# Altium PCB MainBoardSTM32.PcbDoc
Units mil, origin at the board's own origin, x right, y up, seen from the top; angles counter-clockwise.
Board outline 4905 x 5465 mil, 2 copper layers (Top Layer, Bottom Layer); 34 components, 43 nets, 169 pads, 216 vias.
Unrouted connection lines stored in the file: 7.
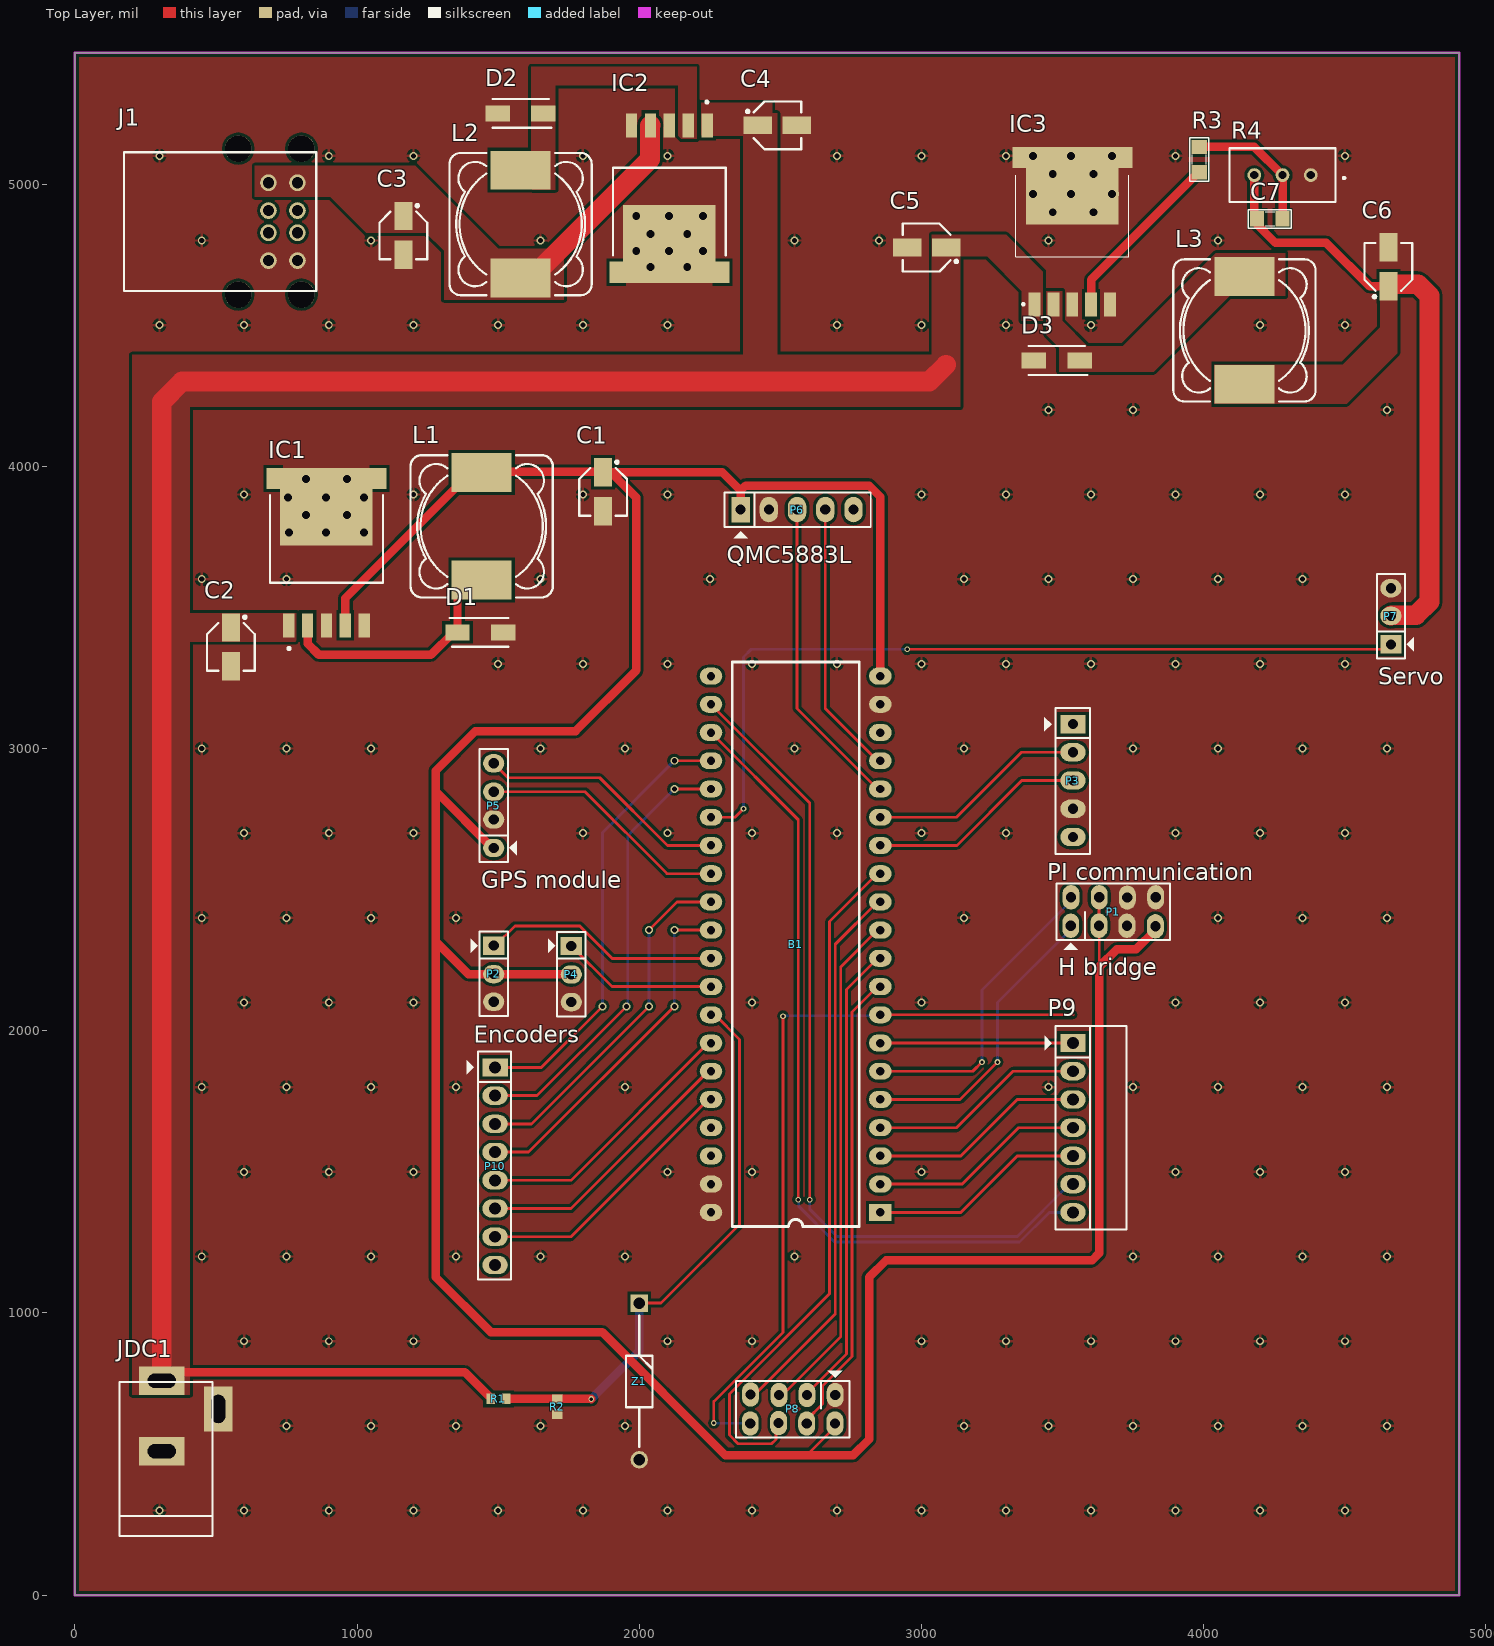
[diagram p0: Top Layer view]
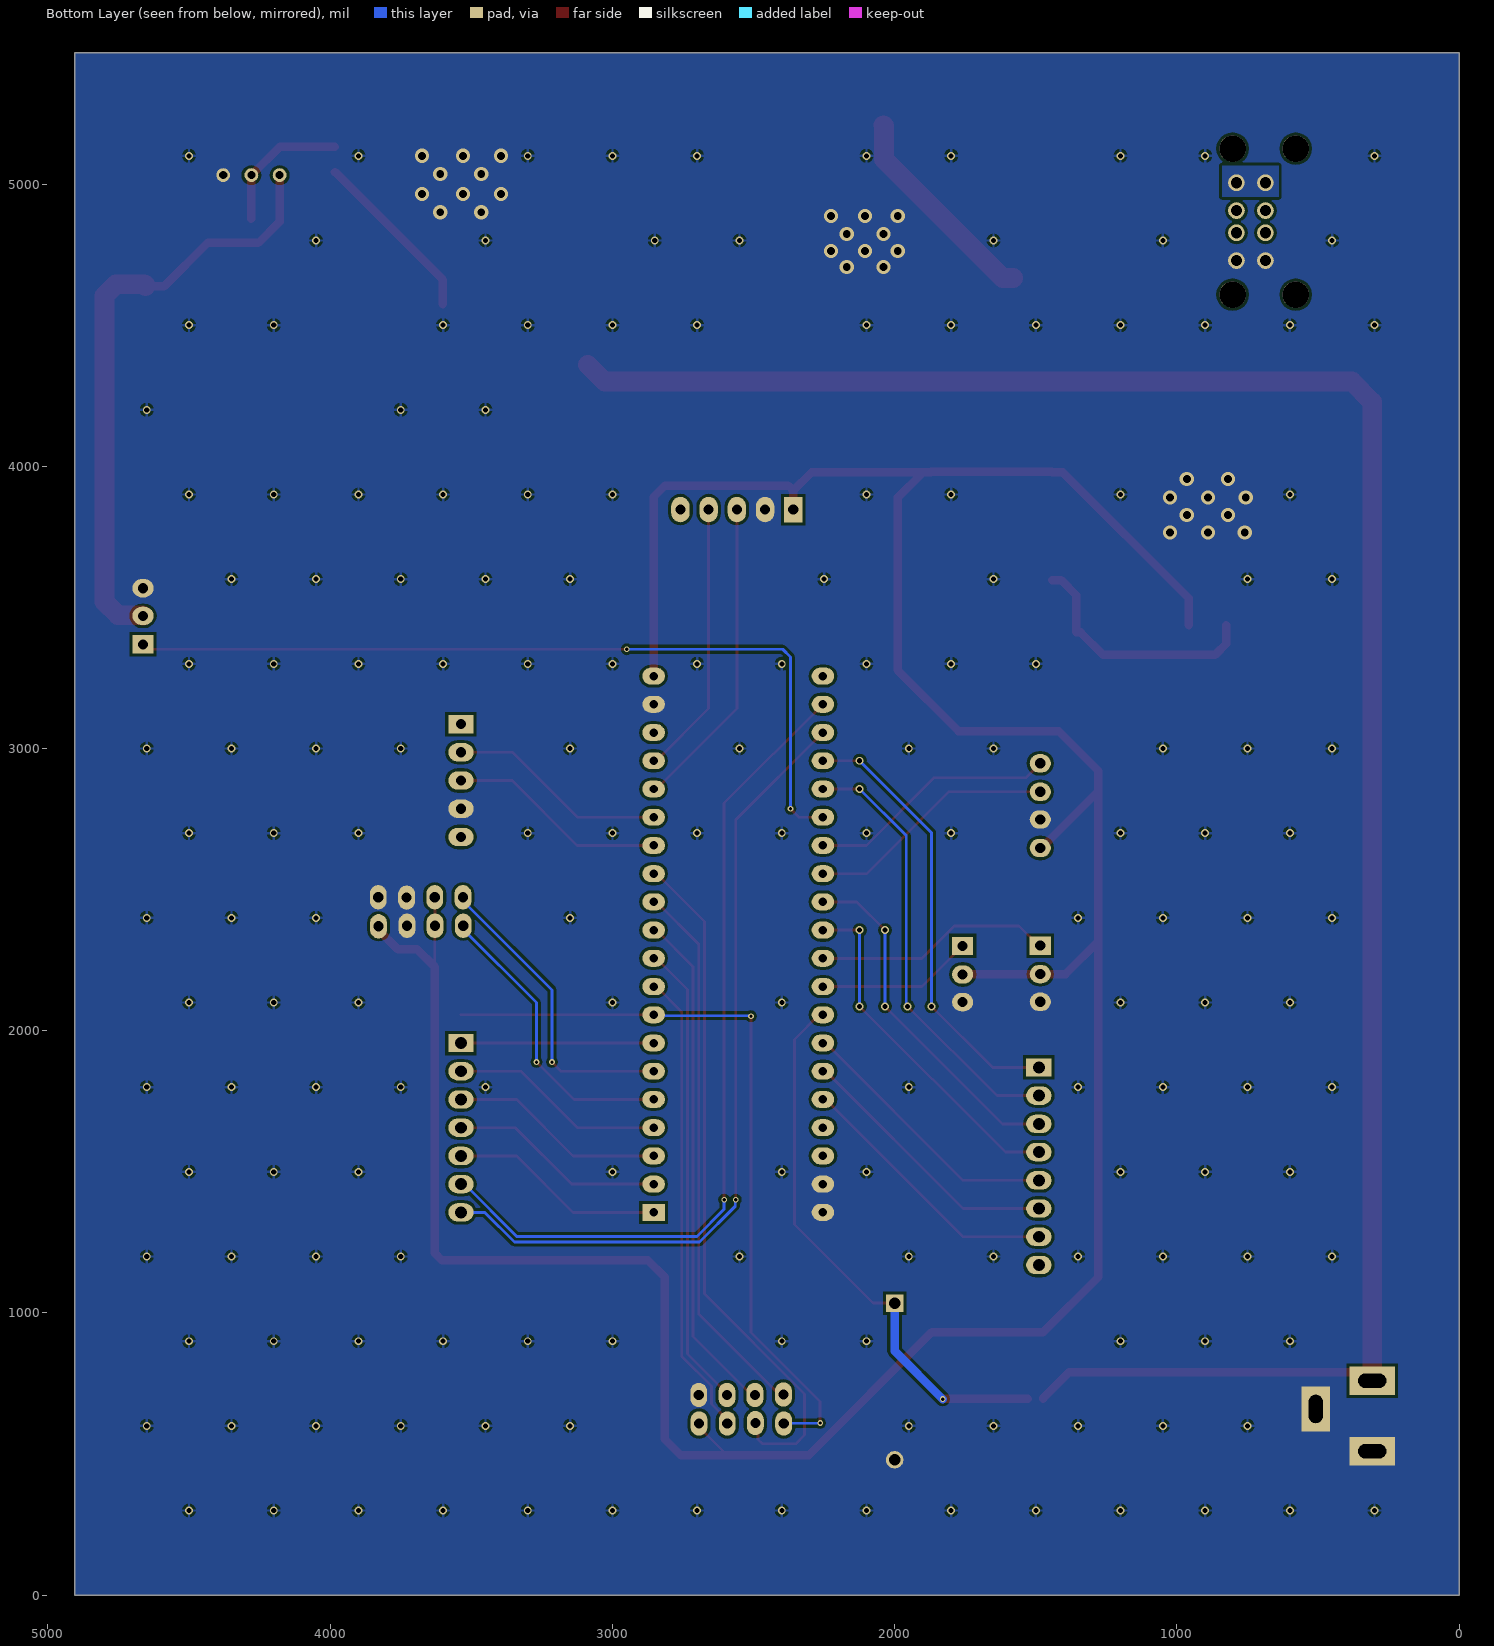
[diagram p1: Bottom Layer view, seen from below]
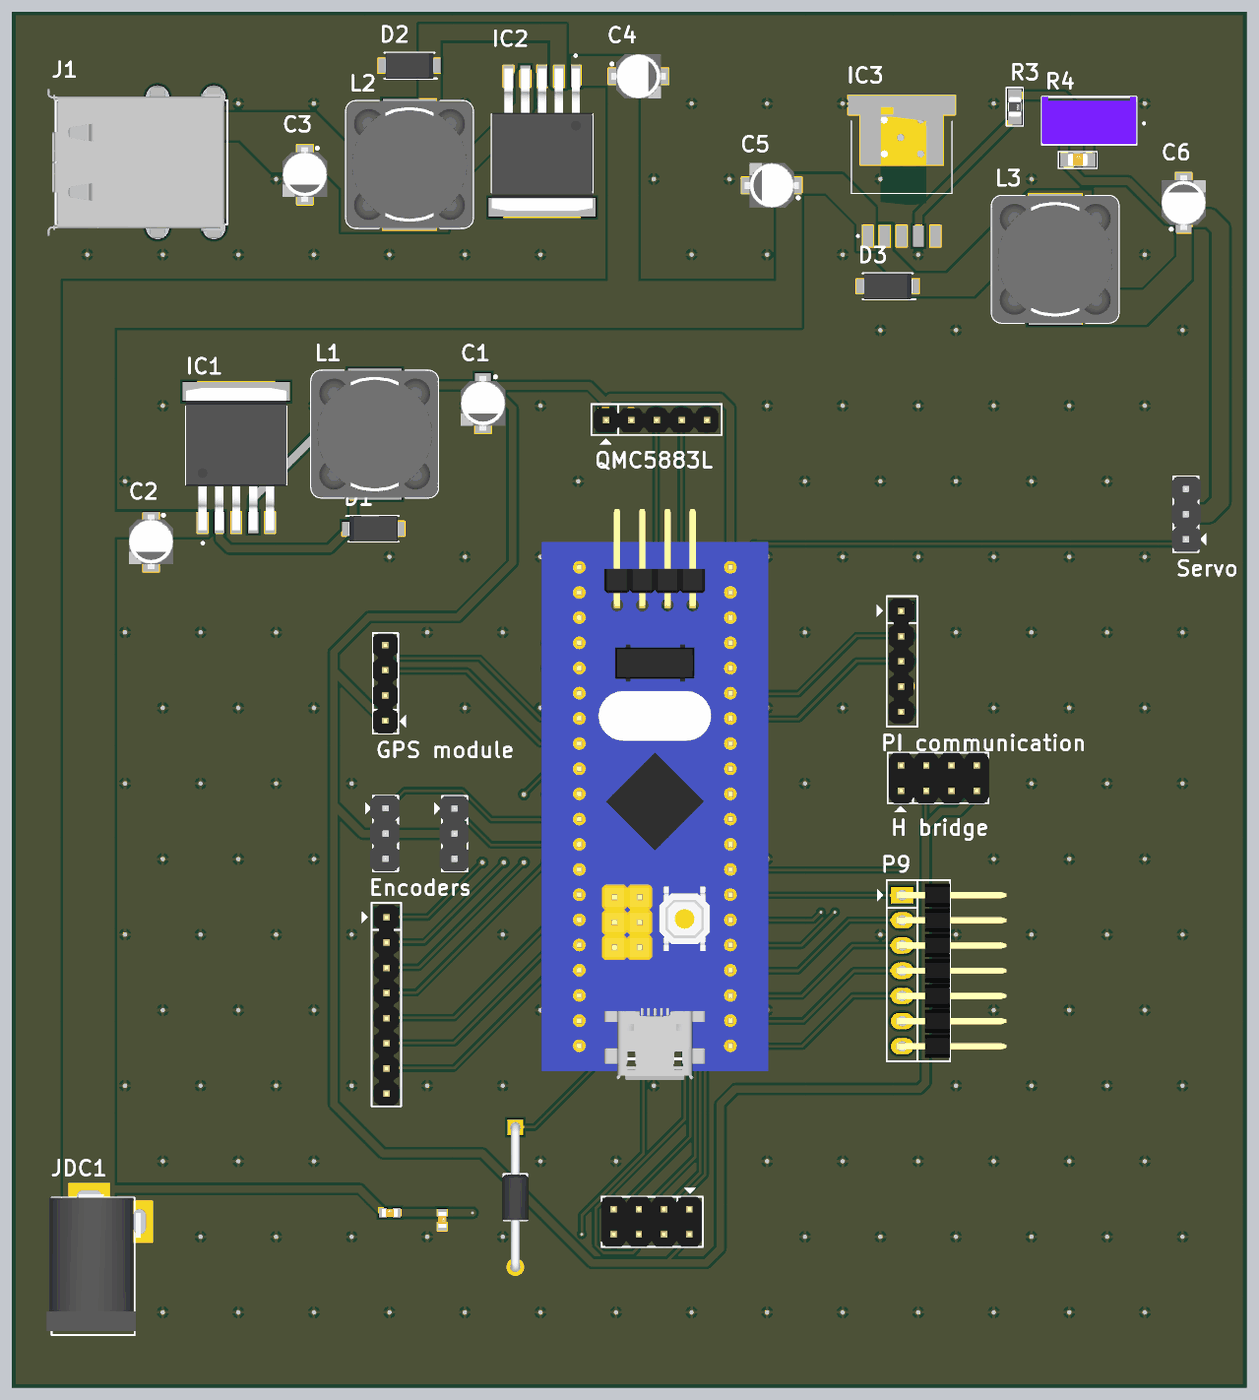
[diagram p2: 3D render of the assembled board from above, using the file's embedded part models]

## Layer stack, top to bottom
Top Solder: solder mask 0.4, Solder Resist, Dk 3.5
Top Layer: signal copper 1.4
Dielectric 1: dielectric 12.6, FR-4, Dk 4.8
Bottom Layer: signal copper 1.4
Bottom Solder: solder mask 0.4, Solder Resist, Dk 3.5

## Board outline
0,0 0,5465 4905,5465 4905,0

## Design rules (kind name [scope] priority, off if disabled: settings)
Clearance [All] p1: gap=10 ignorepadtopadclearanceinfootprint=FALSE except(0: Arc-Hole Track-Hole SMDPad-Hole THPad-Hole Via-Hole Fill-Hole Poly-Hole Region-Hole Text-Hole)
PolygonConnect PolygonConnect_26 [All vs IsNamedPolygon('Top Layer-No Net')] p1: thpad.connectstyle=Direct thpad.reliefconductorwidth=10 thpad.reliefentries=4 thpad.polygonreliefangle="90 Angle" thpad.airgapwidth=10 smdpad.connectstyle=Direct smdpad.reliefconductorwidth=10 smdpad.reliefentries=4 smdpad.polygonreliefangle="90 Angle" smdpad.airgapwidth=10 via.connectstyle=Relief via.reliefconductorwidth=10 via.reliefentries=4 via.polygonreliefangle="90 Angle" via.airgapwidth=10
PolygonConnect PolygonConnect_25 [All vs IsNamedPolygon('Bottom Layer-GND')] p2: thpad.connectstyle=Direct thpad.reliefconductorwidth=10 thpad.reliefentries=4 thpad.polygonreliefangle="90 Angle" thpad.airgapwidth=10 smdpad.connectstyle=Direct smdpad.reliefconductorwidth=10 smdpad.reliefentries=4 smdpad.polygonreliefangle="90 Angle" smdpad.airgapwidth=10 via.connectstyle=Relief via.reliefconductorwidth=10 via.reliefentries=4 via.polygonreliefangle="90 Angle" via.airgapwidth=10
PolygonConnect PolygonConnect_24 [All vs IsNamedPolygon('Top Layer-GND')] p3: thpad.connectstyle=Direct thpad.reliefconductorwidth=10 thpad.reliefentries=4 thpad.polygonreliefangle="90 Angle" thpad.airgapwidth=10 smdpad.connectstyle=Direct smdpad.reliefconductorwidth=10 smdpad.reliefentries=4 smdpad.polygonreliefangle="90 Angle" smdpad.airgapwidth=10 via.connectstyle=Relief via.reliefconductorwidth=10 via.reliefentries=4 via.polygonreliefangle="90 Angle" via.airgapwidth=10
PolygonConnect PolygonConnect_23 [All vs IsNamedPolygon('Bottom Layer-5V')] p4: thpad.connectstyle=Direct thpad.reliefconductorwidth=10 thpad.reliefentries=4 thpad.polygonreliefangle="90 Angle" thpad.airgapwidth=10 smdpad.connectstyle=Direct smdpad.reliefconductorwidth=10 smdpad.reliefentries=4 smdpad.polygonreliefangle="90 Angle" smdpad.airgapwidth=10 via.connectstyle=Relief via.reliefconductorwidth=10 via.reliefentries=4 via.polygonreliefangle="90 Angle" via.airgapwidth=10
PolygonConnect PolygonConnect_22 [All vs IsNamedPolygon('Top Layer-GND')] p5: thpad.connectstyle=Direct thpad.reliefconductorwidth=10 thpad.reliefentries=4 thpad.polygonreliefangle="90 Angle" thpad.airgapwidth=10 smdpad.connectstyle=Direct smdpad.reliefconductorwidth=10 smdpad.reliefentries=4 smdpad.polygonreliefangle="90 Angle" smdpad.airgapwidth=10 via.connectstyle=Relief via.reliefconductorwidth=10 via.reliefentries=4 via.polygonreliefangle="90 Angle" via.airgapwidth=10
PolygonConnect PolygonConnect_21 [All vs IsNamedPolygon('Top Layer-No Net 7')] p6: thpad.connectstyle=Direct thpad.reliefconductorwidth=10 thpad.reliefentries=4 thpad.polygonreliefangle="90 Angle" thpad.airgapwidth=10 smdpad.connectstyle=Direct smdpad.reliefconductorwidth=10 smdpad.reliefentries=4 smdpad.polygonreliefangle="90 Angle" smdpad.airgapwidth=10 via.connectstyle=Relief via.reliefconductorwidth=10 via.reliefentries=4 via.polygonreliefangle="90 Angle" via.airgapwidth=10
PolygonConnect PolygonConnect_20 [All vs IsNamedPolygon('Top Layer-No Net 8')] p7: thpad.connectstyle=Direct thpad.reliefconductorwidth=10 thpad.reliefentries=4 thpad.polygonreliefangle="90 Angle" thpad.airgapwidth=10 smdpad.connectstyle=Direct smdpad.reliefconductorwidth=10 smdpad.reliefentries=4 smdpad.polygonreliefangle="90 Angle" smdpad.airgapwidth=10 via.connectstyle=Relief via.reliefconductorwidth=10 via.reliefentries=4 via.polygonreliefangle="90 Angle" via.airgapwidth=10
PolygonConnect PolygonConnect_19 [All vs IsNamedPolygon('Top Layer-No Net 8')] p8: thpad.connectstyle=Direct thpad.reliefconductorwidth=10 thpad.reliefentries=4 thpad.polygonreliefangle="90 Angle" thpad.airgapwidth=10 smdpad.connectstyle=Direct smdpad.reliefconductorwidth=10 smdpad.reliefentries=4 smdpad.polygonreliefangle="90 Angle" smdpad.airgapwidth=10 via.connectstyle=Relief via.reliefconductorwidth=10 via.reliefentries=4 via.polygonreliefangle="90 Angle" via.airgapwidth=10
PolygonConnect PolygonConnect_18 [All vs IsNamedPolygon('Top Layer-No Net 9')] p9: thpad.connectstyle=Direct thpad.reliefconductorwidth=10 thpad.reliefentries=4 thpad.polygonreliefangle="90 Angle" thpad.airgapwidth=10 smdpad.connectstyle=Direct smdpad.reliefconductorwidth=10 smdpad.reliefentries=4 smdpad.polygonreliefangle="90 Angle" smdpad.airgapwidth=10 via.connectstyle=Relief via.reliefconductorwidth=10 via.reliefentries=4 via.polygonreliefangle="90 Angle" via.airgapwidth=10
PolygonConnect PolygonConnect_17 [All vs IsNamedPolygon('Top Layer- 12V Main')] p10: thpad.connectstyle=Direct thpad.reliefconductorwidth=10 thpad.reliefentries=4 thpad.polygonreliefangle="90 Angle" thpad.airgapwidth=10 smdpad.connectstyle=Direct smdpad.reliefconductorwidth=10 smdpad.reliefentries=4 smdpad.polygonreliefangle="90 Angle" smdpad.airgapwidth=10 via.connectstyle=Relief via.reliefconductorwidth=10 via.reliefentries=4 via.polygonreliefangle="90 Angle" via.airgapwidth=10
PolygonConnect PolygonConnect_16 [All vs IsNamedPolygon('Top Layer-No Net 1')] p11: thpad.connectstyle=Direct thpad.reliefconductorwidth=10 thpad.reliefentries=4 thpad.polygonreliefangle="90 Angle" thpad.airgapwidth=10 smdpad.connectstyle=Direct smdpad.reliefconductorwidth=10 smdpad.reliefentries=4 smdpad.polygonreliefangle="90 Angle" smdpad.airgapwidth=10 via.connectstyle=Relief via.reliefconductorwidth=10 via.reliefentries=4 via.polygonreliefangle="90 Angle" via.airgapwidth=10
PolygonConnect PolygonConnect_15 [All vs IsNamedPolygon('Top Layer-No Net 2')] p12: thpad.connectstyle=Direct thpad.reliefconductorwidth=10 thpad.reliefentries=4 thpad.polygonreliefangle="90 Angle" thpad.airgapwidth=10 smdpad.connectstyle=Direct smdpad.reliefconductorwidth=10 smdpad.reliefentries=4 smdpad.polygonreliefangle="90 Angle" smdpad.airgapwidth=10 via.connectstyle=Relief via.reliefconductorwidth=10 via.reliefentries=4 via.polygonreliefangle="90 Angle" via.airgapwidth=10
PolygonConnect PolygonConnect_14 [All vs IsNamedPolygon('Top Layer- 12-5')] p13: thpad.connectstyle=Direct thpad.reliefconductorwidth=10 thpad.reliefentries=4 thpad.polygonreliefangle="90 Angle" thpad.airgapwidth=10 smdpad.connectstyle=Direct smdpad.reliefconductorwidth=10 smdpad.reliefentries=4 smdpad.polygonreliefangle="90 Angle" smdpad.airgapwidth=10 via.connectstyle=Relief via.reliefconductorwidth=10 via.reliefentries=4 via.polygonreliefangle="90 Angle" via.airgapwidth=10
PolygonConnect PolygonConnect_13 [All vs IsNamedPolygon('Top Layer-12-6')] p14: thpad.connectstyle=Direct thpad.reliefconductorwidth=10 thpad.reliefentries=4 thpad.polygonreliefangle="90 Angle" thpad.airgapwidth=10 smdpad.connectstyle=Direct smdpad.reliefconductorwidth=10 smdpad.reliefentries=4 smdpad.polygonreliefangle="90 Angle" smdpad.airgapwidth=10 via.connectstyle=Relief via.reliefconductorwidth=10 via.reliefentries=4 via.polygonreliefangle="90 Angle" via.airgapwidth=10
PolygonConnect PolygonConnect_12 [All vs IsNamedPolygon('Top Layer-No Net 4')] p15: thpad.connectstyle=Direct thpad.reliefconductorwidth=10 thpad.reliefentries=4 thpad.polygonreliefangle="90 Angle" thpad.airgapwidth=10 smdpad.connectstyle=Direct smdpad.reliefconductorwidth=10 smdpad.reliefentries=4 smdpad.polygonreliefangle="90 Angle" smdpad.airgapwidth=10 via.connectstyle=Relief via.reliefconductorwidth=10 via.reliefentries=4 via.polygonreliefangle="90 Angle" via.airgapwidth=10
PolygonConnect PolygonConnect_11 [All vs IsNamedPolygon('Top Layer-No Net 3')] p16: connectstyle=Direct reliefconductorwidth=10 reliefentries=4 polygonreliefangle="90 Angle" airgapwidth=10
PolygonConnect PolygonConnect_10 [All vs IsNamedPolygon('Top Layer-No Net 3')] p17: connectstyle=Direct reliefconductorwidth=10 reliefentries=4 polygonreliefangle="90 Angle" airgapwidth=10
PolygonConnect PolygonConnect_9 [All vs IsNamedPolygon('Top Layer-No Net 4')] p18: connectstyle=Direct reliefconductorwidth=10 reliefentries=4 polygonreliefangle="90 Angle" airgapwidth=10
PolygonConnect PolygonConnect_8 [All vs IsNamedPolygon('Top Layer-12-6')] p19: connectstyle=Direct reliefconductorwidth=10 reliefentries=4 polygonreliefangle="90 Angle" airgapwidth=10
PolygonConnect PolygonConnect_7 [All vs IsNamedPolygon('Top Layer- 12-5')] p20: connectstyle=Direct reliefconductorwidth=10 reliefentries=4 polygonreliefangle="90 Angle" airgapwidth=10
PolygonConnect PolygonConnect_6 [InNet('OUTPUT5V') vs IsNamedPolygon('Top Layer-No Net 2')] p21: connectstyle=Direct reliefconductorwidth=10 reliefentries=4 polygonreliefangle="90 Angle" airgapwidth=10
PolygonConnect PolygonConnect_5 [All vs IsNamedPolygon('Top Layer-No Net 2')] p22: connectstyle=Direct reliefconductorwidth=10 reliefentries=4 polygonreliefangle="90 Angle" airgapwidth=10
PolygonConnect PolygonConnect_4 [All vs IsNamedPolygon('Top Layer-No Net 2')] p23: thpad.connectstyle=Direct thpad.reliefconductorwidth=10 thpad.reliefentries=4 thpad.polygonreliefangle="90 Angle" thpad.airgapwidth=10 smdpad.connectstyle=Direct smdpad.reliefconductorwidth=10 smdpad.reliefentries=4 smdpad.polygonreliefangle="90 Angle" smdpad.airgapwidth=10 via.connectstyle=Relief via.reliefconductorwidth=10 via.reliefentries=4 via.polygonreliefangle="90 Angle" via.airgapwidth=10
PolygonConnect PolygonConnect_3 [All vs IsNamedPolygon('Top Layer-No Net 2')] p24: thpad.connectstyle=Direct thpad.reliefconductorwidth=10 thpad.reliefentries=4 thpad.polygonreliefangle="90 Angle" thpad.airgapwidth=10 smdpad.connectstyle=Direct smdpad.reliefconductorwidth=10 smdpad.reliefentries=4 smdpad.polygonreliefangle="90 Angle" smdpad.airgapwidth=10 via.connectstyle=Relief via.reliefconductorwidth=10 via.reliefentries=4 via.polygonreliefangle="90 Angle" via.airgapwidth=10
PolygonConnect PolygonConnect_2 [All vs IsNamedPolygon('Top Layer-No Net 1')] p25: thpad.connectstyle=Direct thpad.reliefconductorwidth=10 thpad.reliefentries=4 thpad.polygonreliefangle="90 Angle" thpad.airgapwidth=10 smdpad.connectstyle=Direct smdpad.reliefconductorwidth=10 smdpad.reliefentries=4 smdpad.polygonreliefangle="90 Angle" smdpad.airgapwidth=10 via.connectstyle=Relief via.reliefconductorwidth=10 via.reliefentries=4 via.polygonreliefangle="90 Angle" via.airgapwidth=10
PolygonConnect PolygonConnect_1 [All vs IsNamedPolygon('Top Layer- 12V Main')] p26: thpad.connectstyle=Direct thpad.reliefconductorwidth=10 thpad.reliefentries=4 thpad.polygonreliefangle="90 Angle" thpad.airgapwidth=10 smdpad.connectstyle=Direct smdpad.reliefconductorwidth=10 smdpad.reliefentries=4 smdpad.polygonreliefangle="90 Angle" smdpad.airgapwidth=10 via.connectstyle=Relief via.reliefconductorwidth=10 via.reliefentries=4 via.polygonreliefangle="90 Angle" via.airgapwidth=10
PolygonConnect [All] p27: connectstyle=Relief reliefconductorwidth=10 reliefentries=4 polygonreliefangle="90 Angle" airgapwidth=10
RoutingVias [All] p1: holewidth=18 width=30 viastyle="Through Hole" minholewidth=12 minwidth=20 maxholewidth=25 maxwidth=28
SolderMaskExpansion [All] p1: expansion=4
Width [All] p1: maxlimit=70 minlimit=10 preferedwidth=30 minimp=50.000000 maximp=50.000000 favimp=50.000000
30 further rules are at their usual default settings.

## Classes and differential pairs
component class MainBoardSTM32: B1 C1 C2 C3 C4 C5 C6 C7 IC1 IC2 IC3 J1 JDC1 L1 L2 L3 P1 P2 P3 P4 P5 P6 P7 P8 P9 R1 R2 R3 R4 Z1

## Components (designator, comment, footprint, x,y, rotation, side; value= is the part's Value field where it differs from the comment)
B1 "Bluepill" Bluepill 2854.2,1356.5 r180 top
C1 "Cap Pol SMD" "CAP ALU SIZE B" 1871.7,3909.45 r270 top value=220uF
C2 "Cap Pol SMD" "CAP ALU SIZE B" 553.2,3360 r270 top value=680uF
C3 "Cap Pol SMD" "CAP ALU SIZE B" 1164.2,4818 r270 top value=220uF
C4 "Cap Pol SMD" "CAP ALU SIZE B" 2489.2,5208 r0 top value=680uF
C5 "Cin" "CAP ALU SIZE B" 3018.2,4775 r180 top value=470uF
C6 "Cout" "CAP ALU SIZE B" 4654.2,4706.5 r90 top value=220uF
C7 "CFF" CAP-SM-0805 4189.2,4876.5 r0 top value=680uF
D1 "SS54" DIOM5026X262N 1436.7,3411.5 r0 top
D2 "SS54" DIOM5026X262N 1579.71,5250.52 r180 top
D3 "SS54" DIOM5026X262N 3479.2,4374.45 r180 top
IC1 "LM2596SX-3.3_NOPB" KTT0005B 891.7,3927.09 r270 top
IC2 "LM2596S-5.0_NOPB" KTT0005B 2106.64,4717.41 r90 top
IC3 "LM2596S-ADJ_NOPB" LM2596SXADJ 3534.2,4831.5 r270 top
J1 "Pi's power" MOLEX-DUALUSB 686.29,4866.66 r270 top
JDC1 "Jack DC" DC-IN 408.2,635 r90 top value="Jac DC"
L1 "Inductor" "INDUCTOR 12.5x12.5" 1441.7,3787.41 r270 top value=33uH
L2 "Inductor" "INDUCTOR 12.5x12.5" 1579.71,4858 r90 top value=33uH
L3 "Inductor" "INDUCTOR 12.5x12.5" 4144.2,4481.5 r90 top value=33uH
P1 "H bridge" JP4x2 3679.2,2421.5 r0 top
P2 "Encoders" JP3 1484.2,2201.5 r270 top
P3 "PI communication" JP5 3536.7,3086.5 r270 top
P4 "Encoder2" JP3 1759.2,2200.5 r270 top
P5 "GPS module" JP4 1484.2,2747.5 r90 top
P6 "QMC5883L" JP5 2359.2,3846.5 r0 top
P7 "Servo" JP3 4663.2,3469 r90 top
P8 "NRF24L01" JP4x2 2543.7,660 r180 top
P9 "Spare 2" JP7H 3536.7,1956.5 r270 top
P10 "Spare 1" JP8 1489.2,1870 r270 top
R1 "RESISTOR SMD" RES-SM-0603 1474.2,695.56 r0 top value=1K
R2 "RESISTOR SMD" RES-SM-0603 1710,695 r270 top value=1K
R3 "RESISTOR SMD" RES-SM-0805 3984.2,5131.7 r270 top value=1K
R4 "3296W-1-101LF" 3296W-1 4279.2,5031.5 r180 top
Z1 "1N4728ATR" DIOAD1413W86L463D238 2000,1035 r270 top

## Footprints (in the part's own frame and the unit in brackets; to place one, negate y for a bottom-side part, rotate by r counter-clockwise, add the part's x,y. Pads: shape width x height; smd on the part's side, far side on the other; paste and mask are expansions set on the pad)
3296W-1 [mm]
  round 1.24 hole 0.74: 1(-2.54,0) 2(0,0) 3(2.54,0)
  silkscreen extent -5.64,-2.41 4.76,2.41, body extent -4.78,-2.48 4.78,2.35, height 11.55
Bluepill [mil]
  rect 80x60 / inner rect 100x50 / far side rect 80x60 hole 30: 1(0,0)
  oval 80x60 / inner oval 100x50 / far side oval 80x60 hole 30: 2(0,-100) 3(0,-200) 4(0,-300) 5(0,-400) 6(0,-500) 7(0,-600) 8(0,-700) 9(0,-800) 10(0,-900) 11(0,-1000) 12(0,-1100) 13(0,-1200) 14(0,-1300) 15(0,-1400) 16(0,-1500) 17(0,-1600) 18(0,-1700) 19(0,-1800) 20(0,-1900) 21(600,-1900) 22(600,-1800) 23(600,-1700) 24(600,-1600) 25(600,-1500) 26(600,-1400) 27(600,-1300) 28(600,-1200) 29(600,-1100) 30(600,-1000) 31(600,-900) 32(600,-800) 33(600,-700) 34(600,-600) 35(600,-500) 36(600,-400) 37(600,-300) 38(600,-200) 39(600,-100) 40(600,0)
  silkscreen extent 75,-1950 525,50, body extent -1100,-2133 1000,500, height 385
"CAP ALU SIZE B" [mm] "Capacitor, Aluminium Electrolytric, 4.3mm L X 4.3mm W X 5.4mm H, IPC Medium Density"
  rect 2.55x1.6 smd: 1(-1.75,0) 2(1.75,0)
  silkscreen extent -2.8,-2.15 2.15,2.15, body extent -2.75,-2.25 2.75,2.25, height 5.7
CAP-SM-0805 [mil]
  rect 50x55 smd: 1(0,0) 2(90,0)
  silkscreen extent -32,-34 121,33, body extent 6,-25 84,25, height 31
DC-IN [mil] "Jac DC input"
  rect 100x160 hole 50 slot 100 at 90 deg: 1(125,100) 2(-125,100)
  rect 160x100 hole 50 slot 100 at 0 deg: 3(25,-100)
  silkscreen extent -425,-80 120,250, body extent -410,-105 134,269, height 434
DIOAD1413W86L463D238 [mm]
  rect 1.575x1.575 hole 1.05: 1(0,0)
  round 1.575 hole 1.05: 2(14.1,0)
  silkscreen extent 1.14,-1.19 12.96,1.19, body extent -0.43,-1.36 14.56,1.36, height 2.71
DIOM5026X262N [mm]
  rect 2.2x1.45 smd: 1(-2.05,0) 2(2.05,0)
  silkscreen extent -2.78,-1.3 2.52,1.3, body extent -2.52,-1.3 2.52,1.3, height 2.62
"INDUCTOR 12.5x12.5" [mm] "SMD Inductor  Body Width 12.5mm Body Lenght 12.5mm Height 8mm"
  rect 3.5x5.4 smd: 1(-4.85,0) 2(4.85,0)
  silkscreen extent -6.4,-6.4 6.4,6.4, body extent -6.4,-6.4 6.4,6.4, height 8
JP3 [mil] "Jumper 3"
  rect 65x75 hole 36: 1(-100,0)
  oval 65x75 hole 36: 2(1,0) 3(99,0)
  silkscreen extent -150,-81 150,50, body extent -150,-60 150,55, height 355
JP4 [mil] "Jumper 4"
  oval 65x75 hole 36: 1(-100,0) 2(1,0) 3(99,0) 4(200,0)
  silkscreen extent -150,-81 250,50, body extent -148,-48 248,50, height 323
JP4x2 [mil] "Connector 4x2"
  oval 60x86 hole 36: 1(-150.5,-49.5) 2(-50.5,-49.5) 3(48.5,-49.5) 4(149.5,-51.5) 5(-149.5,51.5) 6(-49.5,51.5) 7(50,50) 8(150.5,51.5)
  silkscreen extent -200,-135 200,100, body extent -197,-100 203,100, height 335
JP5 [mil] "JP5"
  rect 65x90 hole 36: 1(0,0)
  oval 65x90 hole 36: 2(100,0) 3(200,0) 4(300,0) 5(400,0)
  silkscreen extent -57,-101 461,60, body extent -48,-53 448,45, height 323
JP7H [mil]
  rect 65x90 hole 42: 1(0,0)
  oval 65x90 hole 42: 2(100,0) 3(200,0) 4(300,0) 5(400,0) 6(500,0) 7(600,0)
  silkscreen extent -60,-100 660,190, body extent -46,-25 646,414, height 99
JP8 [mil] "JP8"
  rect 65x90 hole 42: 1(0,0)
  oval 65x90 hole 42: 2(100,0) 3(200,0) 4(300,0) 5(400,0) 6(500,0) 7(600,0) 8(700,0)
  silkscreen extent -56,-100 752,57, body extent -48,-50 748,48, height 323
KTT0005B [mm]
  rect 2.16x1.02 smd: 1(12.461,-3.4) 2(12.461,-1.7) 3(12.461,0) 4(12.461,1.7) 5(12.461,3.4)
  rect 6.99x8.33 smd: 6(1.786,0)
  rect 1.91x1.235 smd: 7(-0.754,4.782) 8(-0.754,-4.782)
  silkscreen extent 0.76,-5.08 14.68,5.08, body extent -1.11,-5.08 13.24,5.08, height 4.72
LM2596SXADJ [mm]
  rect 2.16x1.07 smd: 1(6.545,-3.4) 2(6.545,-1.7) 3(6.545,0) 4(6.545,1.7) 5(6.545,3.4)
  rect 1.91x10.8 smd: T1(-6.67,0)
  rect 5.08x8.33 smd: T2(-3.175,0)
  silkscreen extent -5.06,-5.08 6.64,5.08, body extent -6.75,-2.3 7.65,2.5
MOLEX-DUALUSB [mm]
  round 1.5 hole 1: 1(-3.5,0) 2(-1,0) 3(1,0) 4(3.5,0) 5(-3.5,2.61) 6(-1,2.61) 7(1,2.61) 8(3.5,2.61)
  round 2.38 hole 2.38 unplated: 9(-6.57,2.96) 10(6.57,2.96) 11(6.57,-2.72) 12(-6.57,-2.72)
  silkscreen extent -6.25,-13 6.25,4.3, body extent -7.66,-13.82 7.66,4.04, height 15.78
RES-SM-0603 [mm]
  rect 0.8x0.95 smd: 1(-0.014,0) 2(1.386,0)
  body extent -0.11,-0.4 1.49,0.4, height 0.3
RES-SM-0805 [mil]
  rect 50x55 smd: 1(0,0) 2(90,0)
  silkscreen extent -32,-34 121,33, body extent 6,-25 84,25, height 31

## Part data
C1 C2 C3 C4: "Polarized Capacitor (Radial)"
C5 C6: library part "Cap Pol SMD", "Polarized Capacitor (Radial)"
C7: library part "Cap Non-Pol SMD", "Capacitor"
D1 D2 D3: "Schottky Diode", Manufacturer_Name="DIYI Elec Tech", Datasheet Link=https://datasheet.lcsc.com/szlcsc/DIYI-Elec-Tech-SS54_C84165.pdf, Height=2.62mm, Manufacturer_Part_Number=SS54
IC1: "Integrated Circuit", Arrow Part Number=LM2596SX-3.3/NOPB, Manufacturer_Name="Texas Instruments", Mouser Part Number=926-LM2596SX33NOPB, Arrow Price/Stock=https://www.arrow.com/en/products/lm2596sx-3.3nopb/texas-instruments?region=nac, Datasheet Link=http://www.ti.com/lit/gpn/lm2596, Manufacturer_Part_Number=LM2596SX-3.3/NOPB, Mouser Price/Stock=https://www.mouser.co.uk/ProductDetail/Texas-Instruments/LM2596SX-33-NOPB?qs=X1J7HmVL2ZEm4UYTFC0WWA%3D%3D
IC2: "Integrated Circuit", Arrow Part Number=LM2596S-5.0/NOPB, Manufacturer_Name="Texas Instruments", Mouser Part Number=926-LM2596S-5.0/NOPB, Arrow Price/Stock=https://www.arrow.com/en/products/lm2596s-5.0nopb/texas-instruments?region=nac, Datasheet Link=https://www.ti.com/lit/gpn/LM2596, Manufacturer_Part_Number=LM2596S-5.0/NOPB, Mouser Price/Stock=https://www.mouser.co.uk/ProductDetail/Texas-Instruments/LM2596S-50-NOPB?qs=X1J7HmVL2ZHVjCOmW%252BYINA%3D%3D
IC3: "Integrated Circuit", Arrow Part Number=LM2596S-ADJ/NOPB, Manufacturer_Name="Texas Instruments", Mouser Part Number=926-LM2596S-ADJ/NOPB, Arrow Price/Stock=https://www.arrow.com/en/products/lm2596s-adjnopb/texas-instruments?region=nac, Datasheet Link=https://www.ti.com/lit/ds/symlink/lm2596.pdf?HQS=ti-null-null-sf-df-pf-sep-wwe&ts=1592978195629, Height=4.57mm, Manufacturer_Part_Number=LM2596S-ADJ/NOPB, Mouser Price/Stock=https://www.mouser.co.uk/ProductDetail/Texas-Instruments/LM2596S-ADJ-NOPB?qs=X1J7HmVL2ZHoMN0DLDcNog%3D%3D
J1: library part 67298-3090, "Connector", Manufacturer_Name=Molex, Mouser Part Number=538-67298-3090, Datasheet Link=https://datasheet.datasheetarchive.com/originals/distributors/Datasheets_SAMA/769e69235f305794a0165724e99951b5.pdf, Manufacturer_Part_Number=67298-3090, Mouser Price/Stock=https://www.mouser.co.uk/ProductDetail/Molex/67298-3090?qs=x6EjVpvqMVOYHaae5plDDQ%3D%3D
JDC1: "Jack DC input"
P1 P8: library part "Header 4X2", "Header, 4-Pin, Dual row", LatestRevisionDate=17-Jul-2002, LatestRevisionNote="Re-released for DXP Platform.", Publisher="Altium Limited"
P2 P4 P7: library part "Header 3", "Header, 3-Pin", LatestRevisionDate=17-Jul-2002, LatestRevisionNote="Re-released for DXP Platform.", Publisher="Altium Limited"
P3 P6: library part "Header 5", "Header, 5-Pin", LatestRevisionDate=17-Jul-2002, LatestRevisionNote="Re-released for DXP Platform.", Publisher="Altium Limited"
P5: library part "Header 4", "Header, 4-Pin", LatestRevisionDate=17-Jul-2002, LatestRevisionNote="Re-released for DXP Platform.", Publisher="Altium Limited"
P9: library part "Header 7H", "Header, 7-Pin, Right Angle", LatestRevisionDate=17-Jul-2002, LatestRevisionNote="Re-released for DXP Platform.", Publisher="Altium Limited"
P10: library part "Header 8", "Header, 8-Pin", LatestRevisionDate=17-Jul-2002, LatestRevisionNote="Re-released for DXP Platform.", Publisher="Altium Limited"
R1 R2 R3: "Resistor"
R4: "Resistor", Manufacturer_Name=Bourns, Mouser Part Number=652-3296W-1-101LF, Arrow Part Number=3296W-1-101LF, Arrow Price/Stock=https://www.arrow.com/en/products/3296w-1-101lf/bourns?region=nac, Datasheet Link=https://www.bourns.com/pdfs/3296.pdf, Manufacturer_Part_Number=3296W-1-101LF, Mouser Price/Stock=https://www.mouser.co.uk/ProductDetail/Bourns/3296W-1-101LF?qs=UcU9LKO1dwEefwKxVJG4Jw%3D%3D
Z1: "Zener Diode", Manufacturer_Name=onsemi, Mouser Part Number=512-1N4728ATR, Arrow Part Number=1N4728ATR, Arrow Price/Stock=https://www.arrow.com/en/products/1n4728atr/on-semiconductor?region=nac, Datasheet Link=http://www.onsemi.com/pub/Collateral/1N4736AT-D.PDF, Manufacturer_Part_Number=1N4728ATR, Mouser Price/Stock=https://www.mouser.co.uk/ProductDetail/ON-Semiconductor-Fairchild/1N4728ATR?qs=2V4k6Hs0nQm1Vo9UQ1sIIw%3D%3D

## Via types
v1: diameter 28, hole 18, Top Layer to Bottom Layer, tented both sides, 177 vias
v2: diameter 50, hole 28, Top Layer to Bottom Layer, tented both sides, 30 vias
v3: diameter 20, hole 12, Top Layer to Bottom Layer, tented both sides, 9 vias

## Nets (pads, with @x,y where several pads share a name; then routed paths per layer and width w, separated by ;. In a path a pad name is that pad's centre, name@x,y a point inside that pad or via, vN(x,y) a via of type N, cw(c..) or ccw(c..) an arc to the next point about the centre after c; other vN are vias at no path point)
12V: C2.1 C4.1 C5.1 IC1.1 IC2.1 IC3.1 JDC1.1 R1.1 | length 7520.2
  Top Layer w30: JDC1.1 338.2,790 1382.16,790 1473.65,698.51 R1.1
  Top Layer w70: JDC1.1 308.2,3348.9 308.2,4228.2 380,4300 3027.65,4300 3087.1,4359.45
Encoder1: B1.31 P2.1 | length 846.6
  Top Layer w10: P2.1 1489.2,2301.5 1559.2,2371.5 1789.2,2371.5 1904.2,2256.5 B1.31
Encoder2: B1.32 P4.1 | length 554.6
  Top Layer w10: P4.1 1903.2,2156.5 B1.32
FB6V: IC3.4 R3.2 | length 628
  Top Layer w30: IC3.4 3601.35,4574.04 3601.35,4661.34 3981.7,5041.7 R3.2
GND: B1.19 B1.39 B1.40 C1.2 C2.2 C3.2 C4.2 C5.2 C6.2 D1.2 D2.2 D3.2 IC1.3 IC1.5 IC1.6 IC2.3 IC2.5 IC2.6 IC3.3 IC3.5 IC3.T1 IC3.T2 J1.4 J1.8 JDC1.2 JDC1.3 P1.3 P1.7 P1.8 P2.3 P3.4 P4.3 P5.2 P6.2 P7.3 P8.1 R2.2 R4.1 Z1.2
  other v1: 300,300 600,300 900,300 1200,300 1500,300 1800,300 2100,300 2400,300 2700,300 3000,300 3300,300 3600,300 3900,300 4200,300 4500,300 750,600 1050,600 1350,600 1650,600 1950,600 3150,600 3450,600 3750,600 4050,600 4350,600 4650,600 600,900 900,900 1200,900 2100,900 2400,900 3000,900 3300,900 3600,900 3900,900 4200,900 4500,900 450,1200 750,1200 1050,1200 1350,1200 1650,1200 1950,1200 2550,1200 3750,1200 4050,1200 4350,1200 4650,1200 600,1500 900,1500 1200,1500 2100,1500 2400,1500 3000,1500 3900,1500 4200,1500 4500,1500 450,1800 750,1800 1050,1800 1350,1800 1950,1800 3450,1800 3750,1800 4050,1800 4350,1800 4650,1800 600,2100 900,2100 1200,2100 2400,2100 3000,2100 3900,2100 4200,2100 4500,2100 450,2400 750,2400 1050,2400 1350,2400 3150,2400 4050,2400 4350,2400 4650,2400 600,2700 900,2700 1200,2700 1800,2700 2100,2700 2400,2700 2700,2700 3000,2700 3300,2700 3900,2700 4200,2700 4500,2700 450,3000 750,3000 1050,3000 1650,3000 1950,3000 2550,3000 3150,3000 3750,3000 4050,3000 4350,3000 4650,3000 1500,3300 1800,3300 2100,3300 2400,3300 2700,3300 3000,3300 3300,3300 3600,3300 3900,3300 4200,3300 4500,3300 450,3600 750,3600 1650,3600 2250,3600 3150,3600 3450,3600 3750,3600 4050,3600 4350,3600 600,3900 1200,3900 1800,3900 2100,3900 3000,3900 3300,3900 3600,3900 3900,3900 4200,3900 4500,3900 3450,4200 3750,4200 4650,4200 300,4500 600,4500 900,4500 1200,4500 1500,4500 1800,4500 2100,4500 2700,4500 3000,4500 3300,4500 3600,4500 4200,4500 4500,4500 450,4800 1050,4800 1650,4800 2550,4800 2850,4800 3450,4800 4050,4800 300,5100 900,5100 1200,5100 1800,5100 2100,5100 2700,5100 3000,5100 3300,5100 3900,5100 4500,5100
  other v2: 759.52,3765 890,3765 1025,3765 818.57,3826.78 965,3826.78 755.98,3890 890,3890 1025,3890 818.57,3955 965,3955 2039.71,4706.43 2170,4706.43 1989.2,4763 2105,4763 2225.42,4763 2039.71,4822.61 2170,4823.48 1989.2,4886.9 2105,4886.9 2225.42,4886.9 3465,4900 3610,4900 3395,4965 3530,4965 3675,4965 3465,5035 3610,5035 3395,5100 3530,5100 3675,5100
I2C1_SCL: B1.16 P6.3 | length 1118.1
  Top Layer w10: P6.3 2559.2,3141.5 2844.2,2856.5 B1.16
I2C1_SDA: B1.17 P6.4 | length 976.6
  Top Layer w10: P6.4 2659.2,3141.5 2844.2,2956.5 B1.17
LPWM: B1.6 P1.5 | length 1088.9
  Top Layer w10: B1.6@2854.7,1857 B1.6 3181.7,1856.5 v3(3214.2,1889)
  Bottom Layer w10: v3(3214.2,1889) 3214.2,2144.5 3529.7,2460 P1.5
MCU_RX-GPS_TX: B1.28 P5.3 | length 890.1
  Top Layer w10: P5.3 1808.7,2846.5 2098.7,2556.5 B1.28
MCU_RX-PI_TX: B1.15 P3.2 | length 777.8
  Top Layer w10: B1.15 3124.2,2756.5 3354.2,2986.5 P3.2
MCU_TX-GPS_RX: B1.27 P5.4 | length 890.5
  Top Layer w10: P5.4 1535.2,2896.5 1860.2,2896.5 2100.2,2656.5 B1.27
MCU_TX-PI_RX: B1.14 P3.3 | length 777.8
  Top Layer w10: B1.14 3125.2,2656.5 3355.2,2886.5 P3.3
NetC7_2: C7.2 R3.1 R4.2 | length 491.5
  Top Layer w30: R3.1 4179.01,5131.7 R4.2 C7.2
NRF24_IRQ: B1.8 P8.8 | length 2702.2
  Top Layer w10: v3(2264.2,610) 2264.2,686.42 2509.2,931.42 v3(2509.2,2051.5) ; B1.8 3536.7,2056.5
  Bottom Layer w10: v3(2264.2,610) 2264.95,609.25 2392.45,609.25 P8.8 ; v3(2509.2,2051.5) 2511.12,2053.41 2851.12,2053.41 B1.8
OUTPUT3V3: D1.1 IC1.2 L1.2 | length 884.6
  Top Layer w30: IC1.2 824.78,3371.5 864.3,3331.97 1261.7,3331.97 1341.23,3411.5 D1.1 1356,3542.56 1409.89,3596.46 L1.2
OUTPUT5V: D2.1 IC2.2 L2.2
OUTPUT6V: D3.1 IC3.2 L3.2
PA0: B1.25 P10.2 | length 1566.5
  Top Layer w10: P10.2 1637.7,1770 v1(1954.2,2086.5) ; v1(2124.2,2856.5) B1.25
  Bottom Layer w10: v1(1954.2,2086.5) 1959.2,2091.5 1959.2,2691.5 v1(2124.2,2856.5)
PA4: B1.29 P10.3 | length 1248.9
  Top Layer w10: P10.3 1617.7,1670 v1(2034.2,2086.5) ; v1(2034.2,2356.5) 2134.2,2456.5 B1.29
  Bottom Layer w10: v1(2034.2,2086.5) v1(2034.2,2356.5)
PA5: B1.30 P10.4 | length 1248.9
  Top Layer w10: P10.4 1607.7,1570 v1(2124.2,2086.5) ; v1(2124.2,2356.5) B1.30
  Bottom Layer w10: v1(2124.2,2086.5) v1(2124.2,2356.5)
PA10: B1.7 P9.1 | length 682.5
  Top Layer w10: B1.7 P9.1
PB0: B1.33 R1.2 R2.1 Z1.1 | length 1975.1
  Top Layer w10: Z1.1 2076.7,1035 2355,1313.3 2355,1969.34 2267.84,2056.5 B1.33
  Top Layer w30: R1.2 R2.1 1829.44,695.56 v3(1830,695)
  Bottom Layer w30: v3(1830,695) 2000,865 Z1.1
PB1: B1.34 P10.5 | length 966.5
  Top Layer w10: P10.5 1757.7,1470 2244.2,1956.5 B1.34
PB10: B1.35 P10.6 | length 966.5
  Top Layer w10: P10.6 1757.7,1370 2244.2,1856.5 B1.35
PB11: B1.36 P10.7 | length 966.5
  Top Layer w10: P10.7 1757.7,1270 2244.2,1756.5 B1.36
PB12: B1.1 P9.5 | length 765.3
  Top Layer w10: B1.1 3139.2,1356.5 3339.2,1556.5 P9.5
PB13: B1.2 P9.4 | length 765.3
  Top Layer w10: B1.2 3144.2,1456.5 3344.2,1656.5 P9.4
PB14: B1.3 P9.3 | length 765.3
  Top Layer w10: B1.3 3139.2,1556.5 3339.2,1756.5 P9.3
PB15: B1.4 P9.2 | length 765.3
  Top Layer w10: B1.4 3124.2,1656.5 3324.2,1856.5 P9.2
PC13: B1.22 P9.6 | length 2983
  Top Layer w10: B1.22 2604.2,2806.5 v3(2604.2,1401.5)
  Bottom Layer w10: v3(2604.2,1401.5) 2604.2,1367.36 2700.06,1271.5 3339.2,1271.5 3524.2,1456.5 P9.6
PC14: B1.23 P9.7 | length 2874.7
  Top Layer w10: B1.23 2563.2,2747.5 v3(2563.2,1401.5)
  Bottom Layer w10: v3(2563.2,1401.5) 2565.12,1399.59 2565.12,1378.16 2691.78,1251.5 3347.49,1251.5 3452.49,1356.5 P9.7
PC15: B1.24 P10.1 | length 1575.3
  Top Layer w10: P10.1 1652.7,1870 v1(1869.2,2086.5) ; v1(2124.2,2956.5) B1.24
  Bottom Layer w10: v1(1869.2,2086.5) 1869.2,2701.5 v1(2124.2,2956.5)
RPWM: B1.5 P1.1 | length 1060.4
  Top Layer w10: B1.5 3136.7,1756.5 v3(3269.2,1889)
  Bottom Layer w10: v3(3269.2,1889) 3269.2,2099.5 3528.7,2359 P1.1
ServoPWM: B1.26 P7.1 | length 2977.6
  Top Layer w10: B1.26 2339.2,2756.5 v3(2369.2,2786.5) ; v3(2949.2,3351.5) 4645.7,3351.5 P7.1
  Bottom Layer w10: v3(2369.2,2786.5) 2369.2,3324 2396.7,3351.5 v3(2949.2,3351.5)
SPI1_CE: B1.10 P8.2 | length 1660.6
  Top Layer w10: P8.2 2594.2,714.42 2734.2,854.42 2734.2,2146.5 2844.2,2256.5 B1.10
SPI1_CSN: B1.9 P8.6 | length 1662
  Top Layer w10: P8.6 2593.2,621.5 2649.2,677.5 2649.2,741.14 2754.2,846.14 2754.2,2066.5 2844.2,2156.5 B1.9
SPI1_MISO: B1.12 P8.4 | length 1950.2
  Top Layer w10: P8.4 2409.2,711.5 2694.2,996.5 2694.2,2306.5 2844.2,2456.5 B1.12
SPI1_MOSI: B1.13 P8.7 | length 2462.6
  Top Layer w10: P8.7 2484.14,600.43 2484.14,552.29 2468.35,536.5 2350,536.5 2319.2,567.29 2319.2,713.14 2674.2,1068.14 2674.2,2386.5 2844.2,2556.5 B1.13
SPI1_SCK: B1.11 P8.3 | length 1808.6
  Top Layer w10: P8.3 2507.2,709.5 2714.2,916.5 2714.2,2226.5 2844.2,2356.5 B1.11
UU: J1.2 J1.3 J1.6 J1.7 J1.9 J1.10 J1.11 J1.12
VCC3V3: B1.20 C1.1 IC1.4 L1.1 P1.2 P1.4 P1.6 P2.2 P4.2 P5.1 P6.1 P8.5 | length 12061.1
  Top Layer w10: 2594.2,496.5 2693.2,595.5 P8.5 ; 3629.7,2226.5 3629.7,2371 P1.2 3629.2,2372.5 3629.2,2472.5 P1.6
  Top Layer w30: IC1.4 958.63,3532.68 1404.3,3978.35 L1.1 1443.75,3980.4 C1.1@1871.7,3980.4 ; P5.1 1479.2,2647.5 1279.4,2847.3 ; P4.2 1758.7,2200 1484.7,2200 P2.2 1394.2,2200.5 1279.4,2315.3 ; C1.1 C1.1@1900.31,3978.35 ; P6.1 2359.2,3913.93 ; B1.20 2854.2,3891.5 2814.2,3931.5 2376.78,3931.5 2359.2,3913.93 ; P1.4 3828.7,2357 3760.58,2288.88 3692.08,2288.88 3629.7,2226.5 3629.7,1212 3604.2,1186.5 2874.2,1186.5 2814.2,1126.5 2814.2,552.29 2758.41,496.5 2594.2,496.5 2304.2,496.5 1869.2,931.5 1474.2,931.5 1279.4,1126.3 1279.4,2315.3 ; 1279.4,2315.3 1279.4,2847.3 ; 1279.4,2847.3 1279.4,2921.7 1419.2,3061.5 1774.2,3061.5 1989.2,3276.5 1989.2,3889.45 C1.1@1900.31,3978.35 ; C1.1@1900.31,3978.35 2294.78,3978.35 2359.2,3913.93
VCC5V: C3.1 IC2.4 J1.1 J1.5 L2.1 | length 753.4
  Top Layer w70: L2.1 1617.11,4667.06 2037.86,5087.8 2037.86,5206.15 IC2.4
VCC6V: C6.1 C7.1 L3.1 P7.2 R4.3 | length 2144.4
  Top Layer w30: R4.3 4179.2,4866.5 4254.2,4791.5 4434.2,4791.5 4588.1,4637.6 C6.1
  Top Layer w70: C6.1 4654.2,4641.5 4657.71,4645 4758.99,4645 4800,4603.99 4800,3520 4752.5,3472.5 4665.7,3472.5 P7.2
pads on no net: B1.18 B1.21 B1.37 B1.38 IC1.7 IC1.8 IC2.7 IC2.8 P3.1 P3.5 P6.5 P10.8

## Polygon pours and split planes (outlines as drawn)
GND on Top Layer "Top Layer-No Net" (solid, pour order 36): 0,5465 4905,5465 4905,0 0,0
12V on Top Layer "Top Layer-No Net 7" (solid, pour order 26): 785,3479.09 785,3382.96 780.74,3378.7 365,3378.7 365,3479.09
12V on Top Layer "Top Layer-No Net 8" (solid, pour order 24): 3036.91,4743.5 3232.37,4743.5 3355.19,4620.69 3355.19,4515 3430,4515 3430,4690 3300,4820 3036.91,4820
12V on Top Layer "Top Layer-No Net 9" (solid, pour order 22): 2470.5,5287.5 2220.42,5287.5 2220.42,5165.48 2225.42,5170.48 2464.48,5170.48 2470.5,5176.5
VCC6V on Top Layer "Top Layer-No Net 3" (solid, pour order 20): 4037.91,4359.45 4037.91,4221.66 4506.66,4221.66 4685.7,4400.7 4685.7,4687.8 4624.86,4687.8 4624.86,4491.66 4492.66,4359.45
OUTPUT6V on Top Layer "Top Layer-No Net 4" (solid, pour order 18): 3441.8,4620.69 3441.8,4466.4 3488.34,4419.87 3488.34,4335 3823.2,4335 4091.75,4603.55 4288.2,4603.55 4288.2,4755 4043.2,4755 3713.76,4425.56 3587.65,4425.56 3498.2,4515 3498.2,4620.69
12V on Top Layer "Top Layer-12-6" (solid, pour order 16): 3036.91,4806.5 3036.91,4359.45 3123.2,4359.45 3137.3,4373.55 3137.3,4806.5
12V on Top Layer "Top Layer- 12-5" (solid, pour order 14): 2489.2,5250.52 2370.11,5250.52 2368.2,5248.61 2368.2,4325 2489.2,4325
OUTPUT5V on Top Layer "Top Layer-No Net 2" (solid, pour order 10): 1617.11,4980.05 1617.11,5415 2203.2,5415 2203.2,5160 2148.68,5160 2138.2,5170.48 2138.2,5350 1703.2,5350 1703.2,4980.05
VCC5V on Top Layer "Top Layer-No Net 1" (solid, pour order 9): 638.2,5065 638.2,4955 905,4955 1032.71,4827.29 1243.91,4827.29 1308.2,4763 1308.2,4590 1733.2,4590 1733.2,4770 1500.96,4770 1205.96,5065
12V on Top Layer "Top Layer- 12V Main" (solid, pour order 8): 203.2,710 408.2,710 408.2,4210 3137.3,4210 3137.3,4395 3103.2,4395 3053.2,4395 203.2,4395
GND on Bottom Layer "Bottom Layer-GND" (solid, pour order 32): 0,5465 4905,5465 4905,0 0,0
VCC5V on Bottom Layer "Bottom Layer-5V" (solid, pour order 30): 640,5065 640,4955 840,4955 840,5065

## Keep-outs
Top Layer:
  the board outline again, w10